# Altium PCB FET-module.PcbDoc
Units mm, origin at the board's own origin, x right, y up, seen from the top; angles counter-clockwise.
Board outline 152.4 x 101.6 mm, 2 copper layers (Top Layer, Bottom Layer); 5 components, 8 nets, 26 pads, 0 vias.
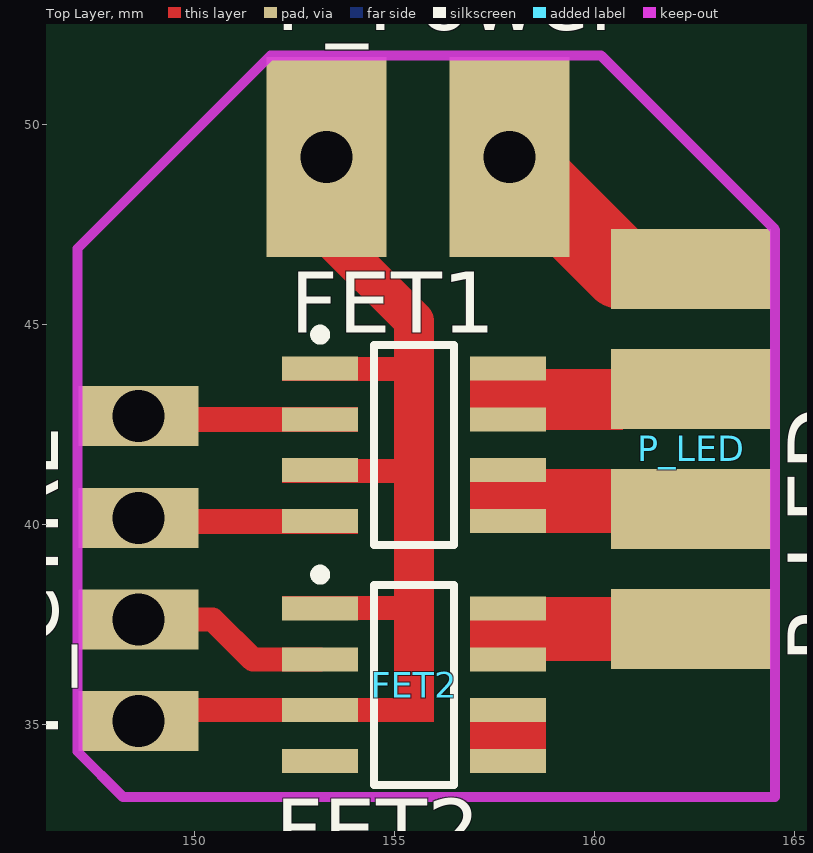
[diagram p0: Top Layer view]
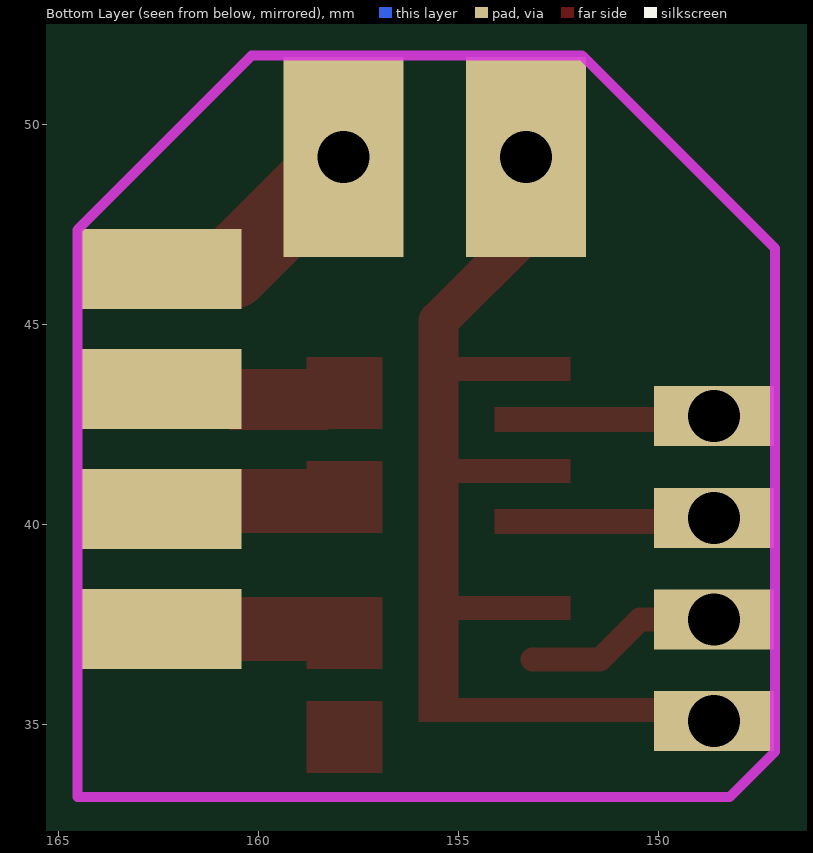
[diagram p1: Bottom Layer view, seen from below]

## Layer stack, top to bottom
Top Solder: solder mask 0.0102, Solder Resist, Dk 3.5
Top Layer: signal copper 0.0356
Dielectric 1: dielectric 0.32, FR-4, Dk 4.8
Bottom Layer: signal copper 0.0356
Bottom Solder: solder mask 0.0102, Solder Resist, Dk 3.5

## Board outline
25.4,25.4 177.8,25.4 177.8,127 25.4,127

## Design rules (kind name [scope] priority, off if disabled: settings)
Clearance [All] p1: gap=0.254
PolygonConnect [All] p1: connectstyle=Relief reliefconductorwidth=0.254 reliefentries=4 polygonreliefangle="90 Angle" airgapwidth=0.254
RoutingVias [All] p1: holewidth=0.711 width=1.27 viastyle="Through Hole" minholewidth=0.711 minwidth=1.27 maxholewidth=0.711 maxwidth=1.27
SolderMaskExpansion [All] p1: expansion=0.102
UnpouredPolygon [All] p1: allowunpoured=FALSE
Width [All] p1: maxlimit=0.254 minlimit=0.254 preferedwidth=0.254
29 further rules are at their usual default settings.

## Components (designator, comment, footprint, x,y, rotation, side; value= is the part's Value field where it differs from the comment)
FET1 "IRF7301" "SOIC8 - IRF FET" 155.5,42 r0 top
FET2 "IRF7301" "SOIC8 - IRF FET" 155.5,36 r0 top
P_CTRL "Controller" "Controller connector" 148.607,40.177 r0 top
P_LED "RGB LED strip" "LED STRIP RGB CONNECTOR" 162.425,42.4 r270 top
P_Power "Power supply" "DC CONNECTOR" 155.592,49.194 r180 top

## Footprints (in the part's own frame and the unit in brackets; to place one, negate y for a bottom-side part, rotate by r counter-clockwise, add the part's x,y. Pads: shape width x height; smd on the part's side, far side on the other; paste and mask are expansions set on the pad)
"Controller connector" [mm]
  rect 3x1.5 hole 1.3: 1(0,2.54) 2(0,0) 3(0,-2.54) 4(0,-5.08)
"DC CONNECTOR" [mm]
  rect 3x5 hole 1.3: 1(-2.286,0) 2(2.286,0)
"LED STRIP RGB CONNECTOR" [mm]
  rect 2x4 all layers, no hole: 1(-4,0) 2(-1,0) 3(2,0) 4(5,0)
"SOIC8 - IRF FET" [mm] "SOIC, 8-Leads, Body 4.9x3.9mm, Pitch 1.27mm, IPC High Density"
  rect 1.9x0.6 smd: 1(-2.35,1.905) 2(-2.35,0.635) 3(-2.35,-0.635) 4(-2.35,-1.905) 5(2.35,-1.905) 6(2.35,-0.635) 7(2.35,0.635) 8(2.35,1.905)
  Top Layer region: 1.4,0.4 3.3,0.4 3.3,2.2 1.4,2.2
  Top Layer region: 1.4,-2.2 3.3,-2.2 3.3,-0.4 1.4,-0.4
  silkscreen extent -2.47,-2.5 1,2.88, body extent -3,-2.45 3,2.45, height 1.75

## Nets (pads, with @x,y where several pads share a name; then routed paths per layer and width w, separated by ;. In a path a pad name is that pad's centre, name@x,y a point inside that pad or via, vN(x,y) a via of type N, cw(c..) or ccw(c..) an arc to the next point about the centre after c; other vN are vias at no path point)
GND: FET1.1 FET1.3 FET2.1 P_CTRL.4 P_Power.2 | length 14.5
  Top Layer w0.254: P_Power.2@153.306,47.289 P_Power.2
  Top Layer w1: P_Power.2@153.306,47.289 155.5,45.095 155.5,35.625
NetFET1_2: FET1.2 P_CTRL.1
NetFET1_4: FET1.4 P_CTRL.2
NetFET1_5: FET1.5 FET1.6 P_LED.3
NetFET1_7: FET1.7 FET1.8 P_LED.2
NetFET2_2: FET2.2 P_CTRL.3 | length 5
  Top Layer w0.6: P_CTRL.3 150.463,37.637 151.465,36.635 FET2.2
NetFET2_7: FET2.7 FET2.8 P_LED.4
VCC: P_LED.1 P_Power.1 | length 6.3
  Top Layer w0.254: P_Power.1@157.878,48.622 P_Power.1 ; P_LED.1@160.672,46.4 P_LED.1
  Top Layer w2: P_Power.1 P_LED.1@160.672,46.4
pads on no net: FET2.3 FET2.4 FET2.5 FET2.6

## Keep-outs
Keep-Out Layer:
  lines w0.254: 160.175,51.725 164.525,47.375 164.525,33.192 148.226,33.192 147.083,34.335 147.083,46.908 151.909,51.734 160.175,51.734

## Other copper
Top Layer:
  rectangle net NetFET1_4: 149.85,39.775 154.1,40.4
  rectangle net NetFET1_2: 149.85,42.325 154.1,42.95
  rectangle net NetFET2_7: 158.425,36.6 160.6,38.2
  rectangle net NetFET1_5: 158.3,39.8 160.475,41.4
  rectangle net NetFET1_7: 158.25,42.375 160.725,43.9
  rectangle net GND: 152.2,43.6 156,44.2
  rectangle net GND: 152.2,41.05 156,41.65
  rectangle net GND: 152.2,37.625 156,38.225
  rectangle net GND: 149.35,35.075 156,35.675